# EAGLE board Qwiic_Haptic_Driver_DA7280-Panel_SOLDERING_JIG (EAGLE 9.6.2), part 1 of 4
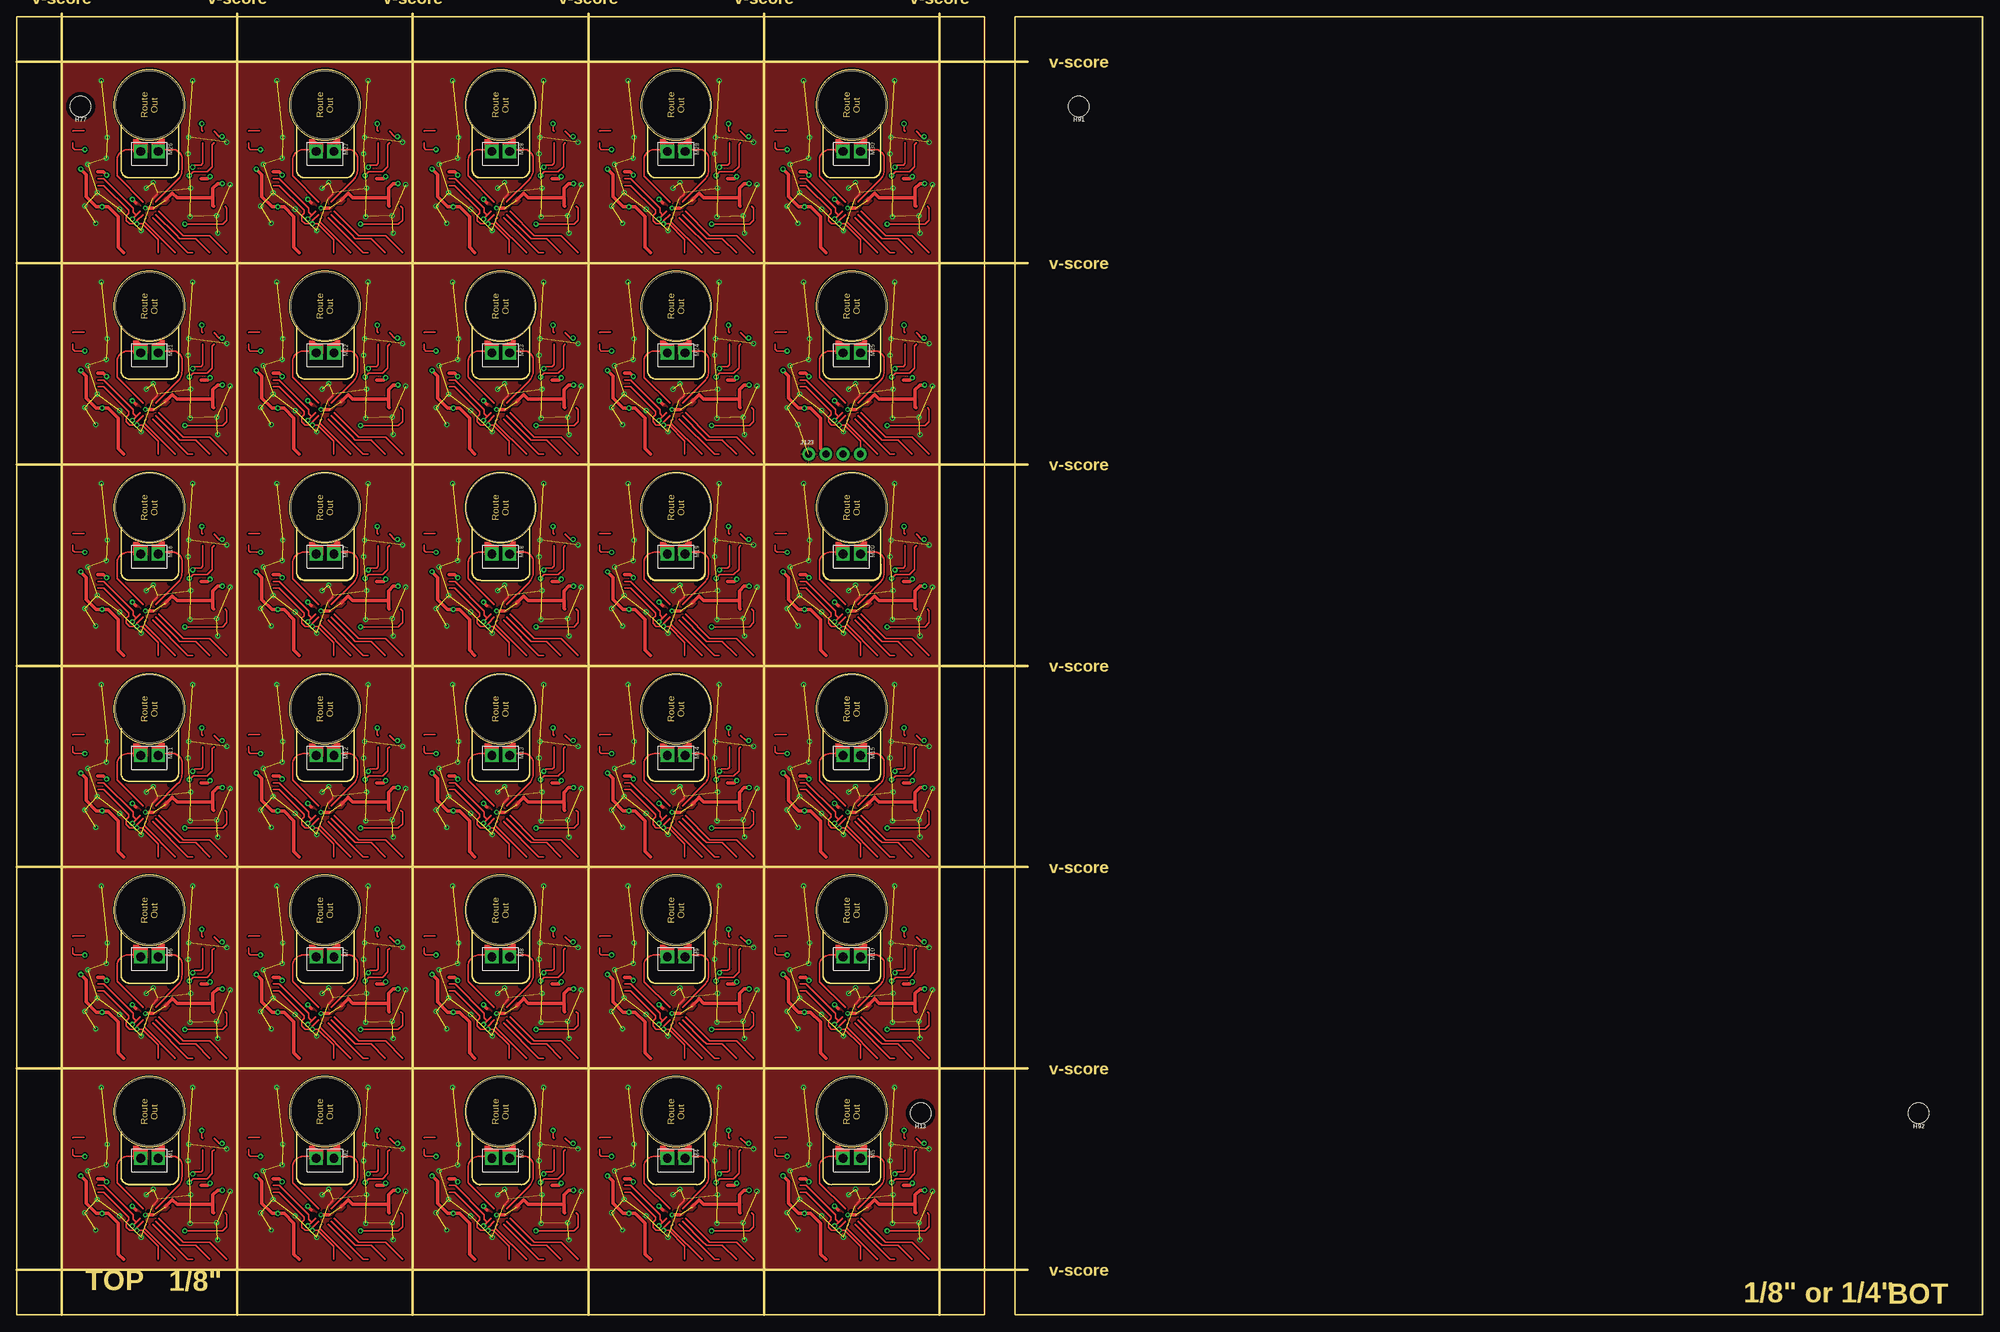
[diagram p0: board, top side]
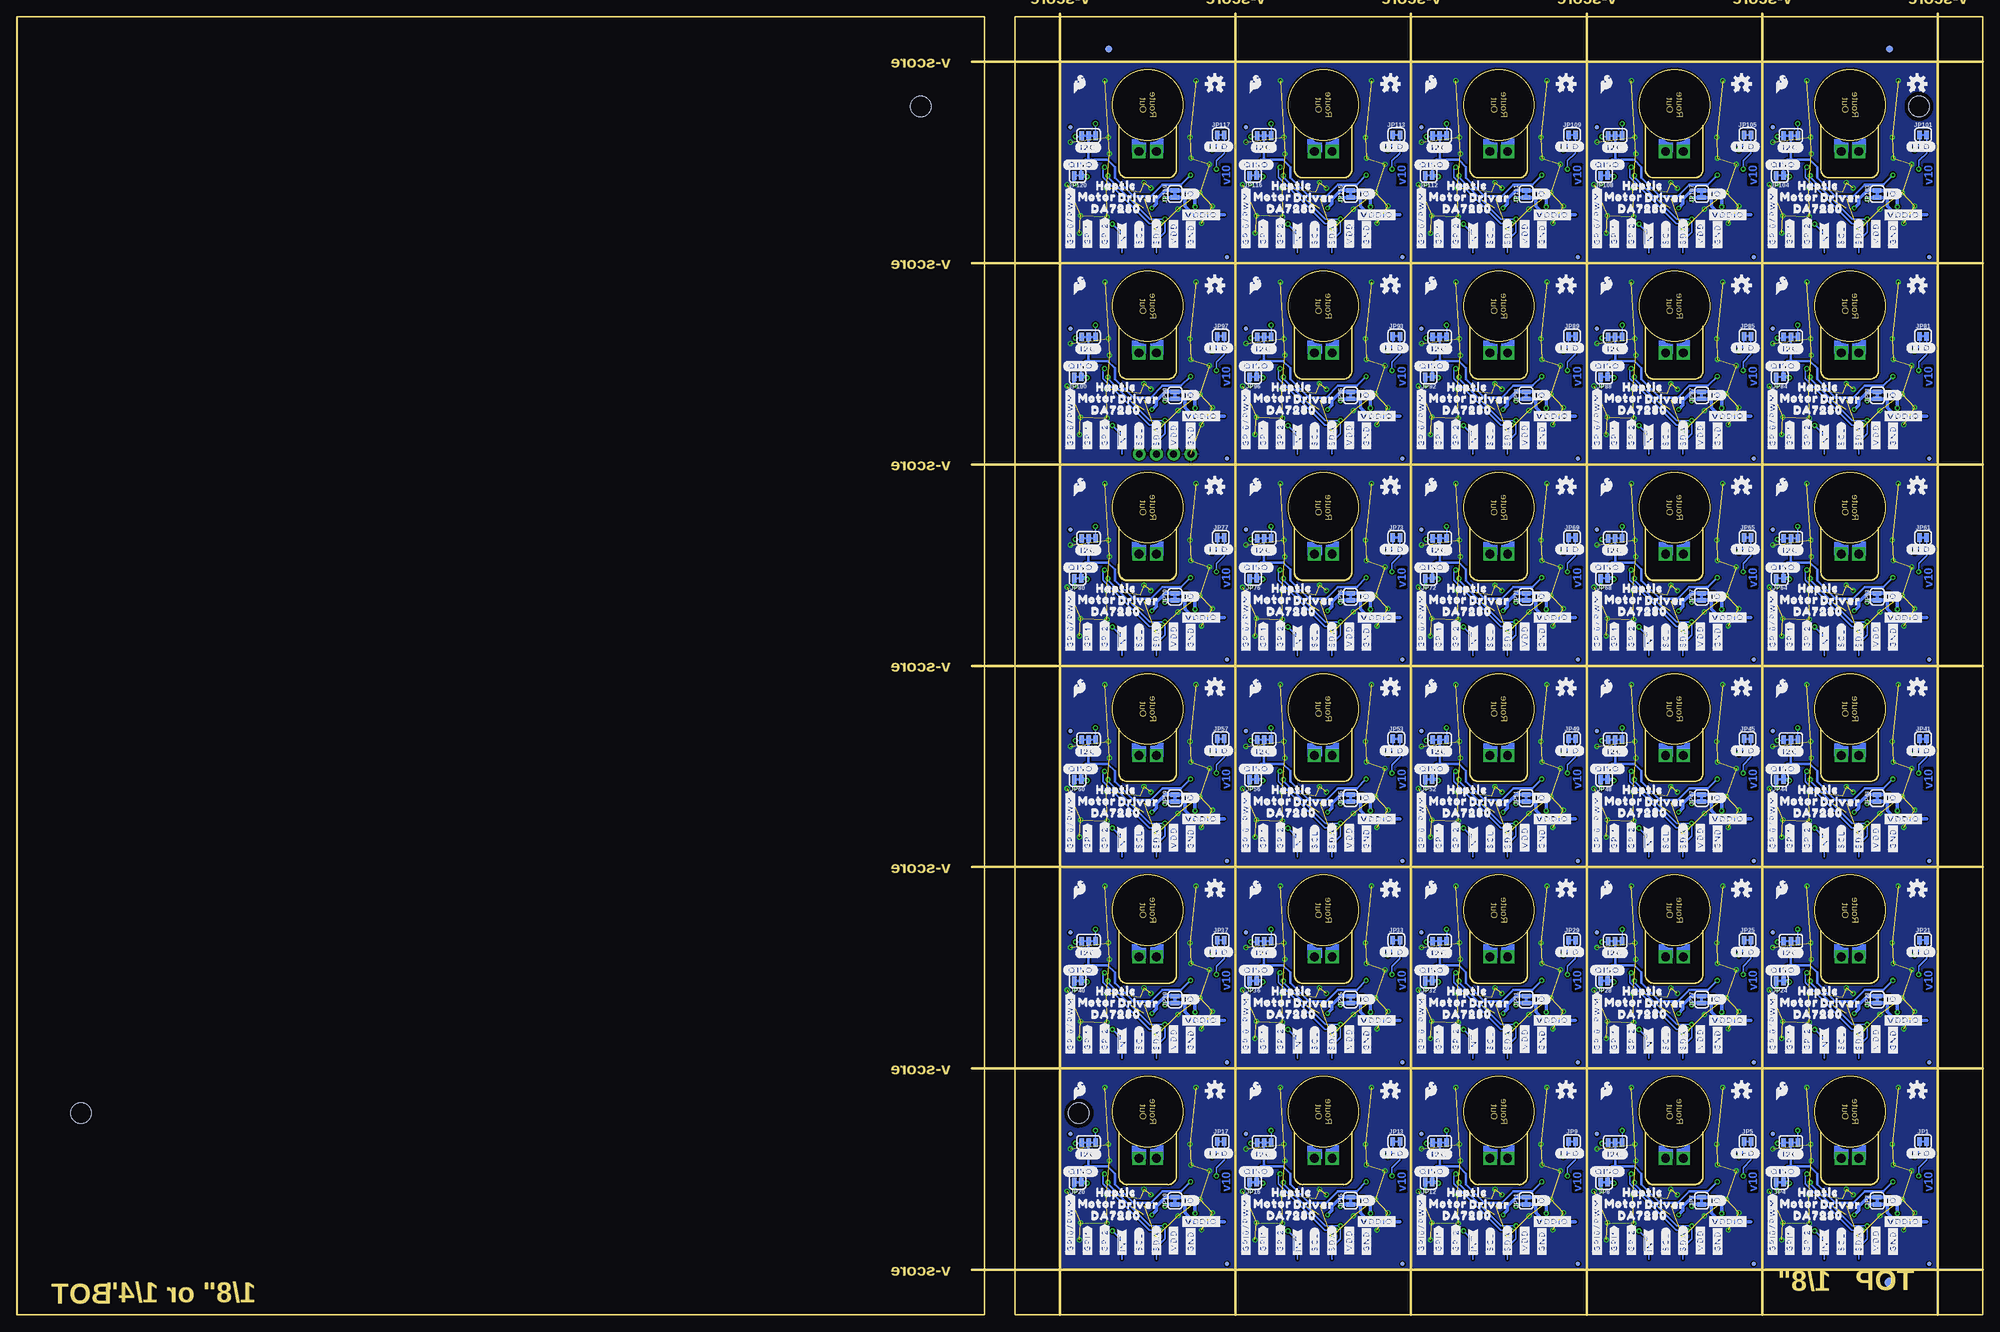
[diagram p1: board, bottom side, seen from below]

Size 290.07 x 191.52 mm. Coordinates in mm from the lower left corner, seen from the top.
Outline: 282 segments
Copper layers (1*16): Top 0.035mm / dielectric 1.5mm / Bottom 0.035mm
Design rules "Qwiic_Haptic_Driver_DA7280": minimum track width 7mil, minimum drill 15mil, track to track 7mil, track to pad 7mil, pad to pad 7mil, via to via 7mil, smd to smd 7mil, copper to edge 7mil, drill to drill 7mil, minimum pad ring 7mil, minimum via ring 7mil, stop-mask expansion 4mil, vias tented up to drill 25mil, thermal gap 10mil
tRestrict: area 19.4,15.2 to 19.7,15.3; area 22.4,18.7 to 22.6,18.8; area 45.3,15.2 to 45.6,15.3; area 48.3,18.7 to 48.5,18.8; area 71.2,15.2 to 71.6,15.3; area 74.2,18.7 to 74.4,18.8; area 97.1,15.2 to 97.5,15.3; area 100.1,18.7 to 100.3,18.8; area 123,15.2 to 123.4,15.3; area 126,18.7 to 126.2,18.8; area 19.4,44.9 to 19.7,45.1; area 22.4,48.4 to 22.6,48.6; 48 more areas
Milling: 13 lines

## Footprints (pad centres in the part's own frame; a part is rotated, then mirrored left to right if it is on the bottom)
FIDUCIAL-1X2 = smd 1 x 1: 1 0,0
FIDUCIAL-1.5X3 = smd 1.5 x 1.5: 1 0,0
FIDUCIAL-MICRO = smd 0.635 x 0.635: 1 0,0
STAND-OFF-TIGHT = hole 3.048: 0,0
1X04_NO_SILK = drill 1.016 pad 1.88: 1 0,0; 2 2.54,0; 3 5.08,0; 4 7.62,0
SMT-JUMPER_2_NC_TRACE_SILK = smd 0.66 x 1.27: 1 -0.521,0; 2 0.521,0
SMT-JUMPER_3_2-NC_TRACE_SILK = smd 0.66 x 1.27: 1 -1.041,0; 2 0,0; 3 1.041,0
COIN_VIBRATION_MOTOR_CASTEL = drill 1.3 square: P$1 6.87,1.31; P$2 6.87,-1.29

## Placement (x,y rotation side)
E$2  [FIDUCIAL-1X2]  13.72,186.75 0 bottom
E$4  [FIDUCIAL-1X2]  128.97,186.75 0 bottom
E$6  [FIDUCIAL-1.5X3]  13.72,4.76 0 bottom
FD2  FIDUCIALUFIDUCIAL  [FIDUCIAL-MICRO]  7.87,7.49 180 bottom
FD4  FIDUCIALUFIDUCIAL  [FIDUCIAL-MICRO]  30.99,26.67 180 bottom
FD6  FIDUCIALUFIDUCIAL  [FIDUCIAL-MICRO]  33.78,7.49 180 bottom
FD8  FIDUCIALUFIDUCIAL  [FIDUCIAL-MICRO]  56.9,26.67 180 bottom
FD10  FIDUCIALUFIDUCIAL  [FIDUCIAL-MICRO]  59.69,7.49 180 bottom
FD12  FIDUCIALUFIDUCIAL  [FIDUCIAL-MICRO]  82.8,26.67 180 bottom
FD14  FIDUCIALUFIDUCIAL  [FIDUCIAL-MICRO]  85.6,7.49 180 bottom
FD16  FIDUCIALUFIDUCIAL  [FIDUCIAL-MICRO]  108.71,26.67 180 bottom
FD18  FIDUCIALUFIDUCIAL  [FIDUCIAL-MICRO]  111.51,7.49 180 bottom
FD20  FIDUCIALUFIDUCIAL  [FIDUCIAL-MICRO]  134.62,26.67 180 bottom
FD22  FIDUCIALUFIDUCIAL  [FIDUCIAL-MICRO]  7.87,37.21 180 bottom
FD24  FIDUCIALUFIDUCIAL  [FIDUCIAL-MICRO]  30.99,56.39 180 bottom
FD26  FIDUCIALUFIDUCIAL  [FIDUCIAL-MICRO]  33.78,37.21 180 bottom
FD28  FIDUCIALUFIDUCIAL  [FIDUCIAL-MICRO]  56.9,56.39 180 bottom
FD30  FIDUCIALUFIDUCIAL  [FIDUCIAL-MICRO]  59.69,37.21 180 bottom
FD32  FIDUCIALUFIDUCIAL  [FIDUCIAL-MICRO]  82.8,56.39 180 bottom
FD34  FIDUCIALUFIDUCIAL  [FIDUCIAL-MICRO]  85.6,37.21 180 bottom
FD36  FIDUCIALUFIDUCIAL  [FIDUCIAL-MICRO]  108.71,56.39 180 bottom
FD38  FIDUCIALUFIDUCIAL  [FIDUCIAL-MICRO]  111.51,37.21 180 bottom
FD40  FIDUCIALUFIDUCIAL  [FIDUCIAL-MICRO]  134.62,56.39 180 bottom
FD42  FIDUCIALUFIDUCIAL  [FIDUCIAL-MICRO]  7.87,66.93 180 bottom
FD44  FIDUCIALUFIDUCIAL  [FIDUCIAL-MICRO]  30.99,86.11 180 bottom
FD46  FIDUCIALUFIDUCIAL  [FIDUCIAL-MICRO]  33.78,66.93 180 bottom
FD48  FIDUCIALUFIDUCIAL  [FIDUCIAL-MICRO]  56.9,86.11 180 bottom
FD50  FIDUCIALUFIDUCIAL  [FIDUCIAL-MICRO]  59.69,66.93 180 bottom
FD52  FIDUCIALUFIDUCIAL  [FIDUCIAL-MICRO]  82.8,86.11 180 bottom
FD54  FIDUCIALUFIDUCIAL  [FIDUCIAL-MICRO]  85.6,66.93 180 bottom
FD56  FIDUCIALUFIDUCIAL  [FIDUCIAL-MICRO]  108.71,86.11 180 bottom
FD58  FIDUCIALUFIDUCIAL  [FIDUCIAL-MICRO]  111.51,66.93 180 bottom
FD60  FIDUCIALUFIDUCIAL  [FIDUCIAL-MICRO]  134.62,86.11 180 bottom
FD62  FIDUCIALUFIDUCIAL  [FIDUCIAL-MICRO]  7.87,96.65 180 bottom
FD64  FIDUCIALUFIDUCIAL  [FIDUCIAL-MICRO]  30.99,115.82 180 bottom
FD66  FIDUCIALUFIDUCIAL  [FIDUCIAL-MICRO]  33.78,96.65 180 bottom
FD68  FIDUCIALUFIDUCIAL  [FIDUCIAL-MICRO]  56.9,115.82 180 bottom
FD70  FIDUCIALUFIDUCIAL  [FIDUCIAL-MICRO]  59.69,96.65 180 bottom
FD72  FIDUCIALUFIDUCIAL  [FIDUCIAL-MICRO]  82.8,115.82 180 bottom
FD74  FIDUCIALUFIDUCIAL  [FIDUCIAL-MICRO]  85.6,96.65 180 bottom
FD76  FIDUCIALUFIDUCIAL  [FIDUCIAL-MICRO]  108.71,115.82 180 bottom
FD78  FIDUCIALUFIDUCIAL  [FIDUCIAL-MICRO]  111.51,96.65 180 bottom
FD80  FIDUCIALUFIDUCIAL  [FIDUCIAL-MICRO]  134.62,115.82 180 bottom
FD82  FIDUCIALUFIDUCIAL  [FIDUCIAL-MICRO]  7.87,126.37 180 bottom
FD84  FIDUCIALUFIDUCIAL  [FIDUCIAL-MICRO]  30.99,145.54 180 bottom
FD86  FIDUCIALUFIDUCIAL  [FIDUCIAL-MICRO]  33.78,126.37 180 bottom
FD88  FIDUCIALUFIDUCIAL  [FIDUCIAL-MICRO]  56.9,145.54 180 bottom
FD90  FIDUCIALUFIDUCIAL  [FIDUCIAL-MICRO]  59.69,126.37 180 bottom
FD92  FIDUCIALUFIDUCIAL  [FIDUCIAL-MICRO]  82.8,145.54 180 bottom
FD94  FIDUCIALUFIDUCIAL  [FIDUCIAL-MICRO]  85.6,126.37 180 bottom
FD96  FIDUCIALUFIDUCIAL  [FIDUCIAL-MICRO]  108.71,145.54 180 bottom
FD98  FIDUCIALUFIDUCIAL  [FIDUCIAL-MICRO]  111.51,126.37 180 bottom
FD100  FIDUCIALUFIDUCIAL  [FIDUCIAL-MICRO]  134.62,145.54 180 bottom
FD102  FIDUCIALUFIDUCIAL  [FIDUCIAL-MICRO]  7.87,156.08 180 bottom
FD104  FIDUCIALUFIDUCIAL  [FIDUCIAL-MICRO]  30.99,175.26 180 bottom
FD106  FIDUCIALUFIDUCIAL  [FIDUCIAL-MICRO]  33.78,156.08 180 bottom
FD108  FIDUCIALUFIDUCIAL  [FIDUCIAL-MICRO]  56.9,175.26 180 bottom
FD110  FIDUCIALUFIDUCIAL  [FIDUCIAL-MICRO]  59.69,156.08 180 bottom
FD112  FIDUCIALUFIDUCIAL  [FIDUCIAL-MICRO]  82.8,175.26 180 bottom
FD114  FIDUCIALUFIDUCIAL  [FIDUCIAL-MICRO]  85.6,156.08 180 bottom
FD116  FIDUCIALUFIDUCIAL  [FIDUCIAL-MICRO]  108.71,175.26 180 bottom
FD118  FIDUCIALUFIDUCIAL  [FIDUCIAL-MICRO]  111.51,156.08 180 bottom
FD120  FIDUCIALUFIDUCIAL  [FIDUCIAL-MICRO]  134.62,175.26 180 bottom
H13  STAND-OFFTIGHT  [STAND-OFF-TIGHT]  133.35,29.72 180 top
H77  STAND-OFFTIGHT  [STAND-OFF-TIGHT]  9.4,178.31 180 top
H91  STAND-OFFTIGHT  [STAND-OFF-TIGHT]  156.7,178.31 180 top
H92  STAND-OFFTIGHT  [STAND-OFF-TIGHT]  280.65,29.72 180 top
J123  [1X04_NO_SILK]  116.84,127 0 top
JP1  LED  [SMT-JUMPER_2_NC_TRACE_SILK]  8.78,25.53 0 bottom
JP2  LED  [SMT-JUMPER_2_NC_TRACE_SILK]  15.54,16.79 90 bottom
JP3  I2C_PU  [SMT-JUMPER_3_2-NC_TRACE_SILK]  28.3,25.4 180 bottom
JP4  LED  [SMT-JUMPER_2_NC_TRACE_SILK]  29.92,19.53 180 bottom
JP5  LED  [SMT-JUMPER_2_NC_TRACE_SILK]  34.68,25.53 0 bottom
JP6  I2C_PU  [SMT-JUMPER_3_2-NC_TRACE_SILK]  54.2,25.4 180 bottom
JP7  LED  [SMT-JUMPER_2_NC_TRACE_SILK]  41.45,16.79 90 bottom
JP8  LED  [SMT-JUMPER_2_NC_TRACE_SILK]  55.83,19.53 180 bottom
JP9  LED  [SMT-JUMPER_2_NC_TRACE_SILK]  60.59,25.53 0 bottom
JP10  I2C_PU  [SMT-JUMPER_3_2-NC_TRACE_SILK]  80.11,25.4 180 bottom
JP11  LED  [SMT-JUMPER_2_NC_TRACE_SILK]  67.36,16.79 90 bottom
JP12  LED  [SMT-JUMPER_2_NC_TRACE_SILK]  81.74,19.53 180 bottom
JP13  LED  [SMT-JUMPER_2_NC_TRACE_SILK]  86.5,25.53 0 bottom
JP14  I2C_PU  [SMT-JUMPER_3_2-NC_TRACE_SILK]  106.02,25.4 180 bottom
JP15  LED  [SMT-JUMPER_2_NC_TRACE_SILK]  93.27,16.79 90 bottom
JP16  LED  [SMT-JUMPER_2_NC_TRACE_SILK]  107.65,19.53 180 bottom
JP17  LED  [SMT-JUMPER_2_NC_TRACE_SILK]  112.41,25.53 0 bottom
JP18  I2C_PU  [SMT-JUMPER_3_2-NC_TRACE_SILK]  131.93,25.4 180 bottom
JP19  LED  [SMT-JUMPER_2_NC_TRACE_SILK]  119.18,16.79 90 bottom
JP20  LED  [SMT-JUMPER_2_NC_TRACE_SILK]  133.55,19.53 180 bottom
JP21  LED  [SMT-JUMPER_2_NC_TRACE_SILK]  8.78,55.24 0 bottom
JP22  I2C_PU  [SMT-JUMPER_3_2-NC_TRACE_SILK]  28.3,55.12 180 bottom
JP23  LED  [SMT-JUMPER_2_NC_TRACE_SILK]  15.54,46.51 90 bottom
JP24  LED  [SMT-JUMPER_2_NC_TRACE_SILK]  29.92,49.25 180 bottom
JP25  LED  [SMT-JUMPER_2_NC_TRACE_SILK]  34.68,55.24 0 bottom
JP26  I2C_PU  [SMT-JUMPER_3_2-NC_TRACE_SILK]  54.2,55.12 180 bottom
JP27  LED  [SMT-JUMPER_2_NC_TRACE_SILK]  41.45,46.51 90 bottom
JP28  LED  [SMT-JUMPER_2_NC_TRACE_SILK]  55.83,49.25 180 bottom
JP29  LED  [SMT-JUMPER_2_NC_TRACE_SILK]  60.59,55.24 0 bottom
JP30  I2C_PU  [SMT-JUMPER_3_2-NC_TRACE_SILK]  80.11,55.12 180 bottom
JP31  LED  [SMT-JUMPER_2_NC_TRACE_SILK]  67.36,46.51 90 bottom
JP32  LED  [SMT-JUMPER_2_NC_TRACE_SILK]  81.74,49.25 180 bottom
JP33  LED  [SMT-JUMPER_2_NC_TRACE_SILK]  86.5,55.24 0 bottom
JP34  I2C_PU  [SMT-JUMPER_3_2-NC_TRACE_SILK]  106.02,55.12 180 bottom
JP35  LED  [SMT-JUMPER_2_NC_TRACE_SILK]  93.27,46.51 90 bottom
JP36  LED  [SMT-JUMPER_2_NC_TRACE_SILK]  107.65,49.25 180 bottom
JP37  LED  [SMT-JUMPER_2_NC_TRACE_SILK]  112.41,55.24 0 bottom
JP38  I2C_PU  [SMT-JUMPER_3_2-NC_TRACE_SILK]  131.93,55.12 180 bottom
JP39  LED  [SMT-JUMPER_2_NC_TRACE_SILK]  119.18,46.51 90 bottom
JP40  LED  [SMT-JUMPER_2_NC_TRACE_SILK]  133.55,49.25 180 bottom
JP41  LED  [SMT-JUMPER_2_NC_TRACE_SILK]  8.78,84.96 0 bottom
JP42  I2C_PU  [SMT-JUMPER_3_2-NC_TRACE_SILK]  28.3,84.84 180 bottom
JP43  LED  [SMT-JUMPER_2_NC_TRACE_SILK]  15.54,76.23 90 bottom
JP44  LED  [SMT-JUMPER_2_NC_TRACE_SILK]  29.92,78.97 180 bottom
JP45  LED  [SMT-JUMPER_2_NC_TRACE_SILK]  34.68,84.96 0 bottom
JP46  I2C_PU  [SMT-JUMPER_3_2-NC_TRACE_SILK]  54.2,84.84 180 bottom
JP47  LED  [SMT-JUMPER_2_NC_TRACE_SILK]  41.45,76.23 90 bottom
JP48  LED  [SMT-JUMPER_2_NC_TRACE_SILK]  55.83,78.97 180 bottom
JP49  LED  [SMT-JUMPER_2_NC_TRACE_SILK]  60.59,84.96 0 bottom
JP50  I2C_PU  [SMT-JUMPER_3_2-NC_TRACE_SILK]  80.11,84.84 180 bottom
JP51  LED  [SMT-JUMPER_2_NC_TRACE_SILK]  67.36,76.23 90 bottom
JP52  LED  [SMT-JUMPER_2_NC_TRACE_SILK]  81.74,78.97 180 bottom
JP53  LED  [SMT-JUMPER_2_NC_TRACE_SILK]  86.5,84.96 0 bottom
JP54  I2C_PU  [SMT-JUMPER_3_2-NC_TRACE_SILK]  106.02,84.84 180 bottom
JP55  LED  [SMT-JUMPER_2_NC_TRACE_SILK]  93.27,76.23 90 bottom
JP56  LED  [SMT-JUMPER_2_NC_TRACE_SILK]  107.65,78.97 180 bottom
JP57  LED  [SMT-JUMPER_2_NC_TRACE_SILK]  112.41,84.96 0 bottom
JP58  I2C_PU  [SMT-JUMPER_3_2-NC_TRACE_SILK]  131.93,84.84 180 bottom
JP59  LED  [SMT-JUMPER_2_NC_TRACE_SILK]  119.18,76.23 90 bottom
JP60  LED  [SMT-JUMPER_2_NC_TRACE_SILK]  133.55,78.97 180 bottom
JP61  LED  [SMT-JUMPER_2_NC_TRACE_SILK]  8.78,114.68 0 bottom
JP62  I2C_PU  [SMT-JUMPER_3_2-NC_TRACE_SILK]  28.3,114.55 180 bottom
JP63  LED  [SMT-JUMPER_2_NC_TRACE_SILK]  15.54,105.95 90 bottom
JP64  LED  [SMT-JUMPER_2_NC_TRACE_SILK]  29.92,108.69 180 bottom
JP65  LED  [SMT-JUMPER_2_NC_TRACE_SILK]  34.68,114.68 0 bottom
JP66  I2C_PU  [SMT-JUMPER_3_2-NC_TRACE_SILK]  54.2,114.55 180 bottom
JP67  LED  [SMT-JUMPER_2_NC_TRACE_SILK]  41.45,105.95 90 bottom
JP68  LED  [SMT-JUMPER_2_NC_TRACE_SILK]  55.83,108.69 180 bottom
JP69  LED  [SMT-JUMPER_2_NC_TRACE_SILK]  60.59,114.68 0 bottom
JP70  I2C_PU  [SMT-JUMPER_3_2-NC_TRACE_SILK]  80.11,114.55 180 bottom
JP71  LED  [SMT-JUMPER_2_NC_TRACE_SILK]  67.36,105.95 90 bottom
JP72  LED  [SMT-JUMPER_2_NC_TRACE_SILK]  81.74,108.69 180 bottom
JP73  LED  [SMT-JUMPER_2_NC_TRACE_SILK]  86.5,114.68 0 bottom
JP74  I2C_PU  [SMT-JUMPER_3_2-NC_TRACE_SILK]  106.02,114.55 180 bottom
JP75  LED  [SMT-JUMPER_2_NC_TRACE_SILK]  93.27,105.95 90 bottom
JP76  LED  [SMT-JUMPER_2_NC_TRACE_SILK]  107.65,108.69 180 bottom
JP77  LED  [SMT-JUMPER_2_NC_TRACE_SILK]  112.41,114.68 0 bottom
JP78  I2C_PU  [SMT-JUMPER_3_2-NC_TRACE_SILK]  131.93,114.55 180 bottom
JP79  LED  [SMT-JUMPER_2_NC_TRACE_SILK]  119.18,105.95 90 bottom
JP80  LED  [SMT-JUMPER_2_NC_TRACE_SILK]  133.55,108.69 180 bottom
JP81  LED  [SMT-JUMPER_2_NC_TRACE_SILK]  8.78,144.4 0 bottom
JP82  I2C_PU  [SMT-JUMPER_3_2-NC_TRACE_SILK]  28.3,144.27 180 bottom
JP83  LED  [SMT-JUMPER_2_NC_TRACE_SILK]  15.54,135.67 90 bottom
JP84  LED  [SMT-JUMPER_2_NC_TRACE_SILK]  29.92,138.4 180 bottom
JP85  LED  [SMT-JUMPER_2_NC_TRACE_SILK]  34.68,144.4 0 bottom
JP86  I2C_PU  [SMT-JUMPER_3_2-NC_TRACE_SILK]  54.2,144.27 180 bottom
JP87  LED  [SMT-JUMPER_2_NC_TRACE_SILK]  41.45,135.67 90 bottom
JP88  LED  [SMT-JUMPER_2_NC_TRACE_SILK]  55.83,138.4 180 bottom
JP89  LED  [SMT-JUMPER_2_NC_TRACE_SILK]  60.59,144.4 0 bottom
JP90  I2C_PU  [SMT-JUMPER_3_2-NC_TRACE_SILK]  80.11,144.27 180 bottom
JP91  LED  [SMT-JUMPER_2_NC_TRACE_SILK]  67.36,135.67 90 bottom
JP92  LED  [SMT-JUMPER_2_NC_TRACE_SILK]  81.74,138.4 180 bottom
JP93  LED  [SMT-JUMPER_2_NC_TRACE_SILK]  86.5,144.4 0 bottom
JP94  I2C_PU  [SMT-JUMPER_3_2-NC_TRACE_SILK]  106.02,144.27 180 bottom
JP95  LED  [SMT-JUMPER_2_NC_TRACE_SILK]  93.27,135.67 90 bottom
JP96  LED  [SMT-JUMPER_2_NC_TRACE_SILK]  107.65,138.4 180 bottom
JP97  LED  [SMT-JUMPER_2_NC_TRACE_SILK]  112.41,144.4 0 bottom
JP98  I2C_PU  [SMT-JUMPER_3_2-NC_TRACE_SILK]  131.93,144.27 180 bottom
JP99  LED  [SMT-JUMPER_2_NC_TRACE_SILK]  119.18,135.67 90 bottom
JP100  LED  [SMT-JUMPER_2_NC_TRACE_SILK]  133.55,138.4 180 bottom
JP101  LED  [SMT-JUMPER_2_NC_TRACE_SILK]  8.78,174.12 0 bottom
JP102  I2C_PU  [SMT-JUMPER_3_2-NC_TRACE_SILK]  28.3,173.99 180 bottom
JP103  LED  [SMT-JUMPER_2_NC_TRACE_SILK]  15.54,165.38 90 bottom
JP104  LED  [SMT-JUMPER_2_NC_TRACE_SILK]  29.92,168.12 180 bottom
JP105  LED  [SMT-JUMPER_2_NC_TRACE_SILK]  34.68,174.12 0 bottom
JP106  I2C_PU  [SMT-JUMPER_3_2-NC_TRACE_SILK]  54.2,173.99 180 bottom
JP107  LED  [SMT-JUMPER_2_NC_TRACE_SILK]  41.45,165.38 90 bottom
JP108  LED  [SMT-JUMPER_2_NC_TRACE_SILK]  55.83,168.12 180 bottom
JP109  LED  [SMT-JUMPER_2_NC_TRACE_SILK]  60.59,174.12 0 bottom
JP110  I2C_PU  [SMT-JUMPER_3_2-NC_TRACE_SILK]  80.11,173.99 180 bottom
JP111  LED  [SMT-JUMPER_2_NC_TRACE_SILK]  67.36,165.38 90 bottom
JP112  LED  [SMT-JUMPER_2_NC_TRACE_SILK]  81.74,168.12 180 bottom
JP113  LED  [SMT-JUMPER_2_NC_TRACE_SILK]  86.5,174.12 0 bottom
JP114  I2C_PU  [SMT-JUMPER_3_2-NC_TRACE_SILK]  106.02,173.99 180 bottom
JP115  LED  [SMT-JUMPER_2_NC_TRACE_SILK]  93.27,165.38 90 bottom
JP116  LED  [SMT-JUMPER_2_NC_TRACE_SILK]  107.65,168.12 180 bottom
JP117  LED  [SMT-JUMPER_2_NC_TRACE_SILK]  112.41,174.12 0 bottom
JP118  I2C_PU  [SMT-JUMPER_3_2-NC_TRACE_SILK]  131.93,173.99 180 bottom
JP119  LED  [SMT-JUMPER_2_NC_TRACE_SILK]  119.18,165.38 90 bottom
JP120  LED  [SMT-JUMPER_2_NC_TRACE_SILK]  133.55,168.12 180 bottom
LOGO1  OSHW-LOGOS  [OSHW-LOGO-S]  35.56,33.02 0 bottom
LOGO2  OSHW-LOGOS  [OSHW-LOGO-S]  9.65,33.02 0 bottom
LOGO5  OSHW-LOGOS  [OSHW-LOGO-S]  61.47,33.02 0 bottom
LOGO7  OSHW-LOGOS  [OSHW-LOGO-S]  87.38,33.02 0 bottom
LOGO9  OSHW-LOGOS  [OSHW-LOGO-S]  113.28,33.02 0 bottom
LOGO11  OSHW-LOGOS  [OSHW-LOGO-S]  9.65,62.74 0 bottom
LOGO13  OSHW-LOGOS  [OSHW-LOGO-S]  35.56,62.74 0 bottom
LOGO15  OSHW-LOGOS  [OSHW-LOGO-S]  61.47,62.74 0 bottom
LOGO17  OSHW-LOGOS  [OSHW-LOGO-S]  87.38,62.74 0 bottom
LOGO19  OSHW-LOGOS  [OSHW-LOGO-S]  113.28,62.74 0 bottom
LOGO21  OSHW-LOGOS  [OSHW-LOGO-S]  9.65,92.46 0 bottom
LOGO23  OSHW-LOGOS  [OSHW-LOGO-S]  35.56,92.46 0 bottom
LOGO25  OSHW-LOGOS  [OSHW-LOGO-S]  61.47,92.46 0 bottom
LOGO27  OSHW-LOGOS  [OSHW-LOGO-S]  87.38,92.46 0 bottom
LOGO29  OSHW-LOGOS  [OSHW-LOGO-S]  113.28,92.46 0 bottom
LOGO31  OSHW-LOGOS  [OSHW-LOGO-S]  9.65,122.17 0 bottom
LOGO33  OSHW-LOGOS  [OSHW-LOGO-S]  35.56,122.17 0 bottom
LOGO35  OSHW-LOGOS  [OSHW-LOGO-S]  61.47,122.17 0 bottom
LOGO37  OSHW-LOGOS  [OSHW-LOGO-S]  87.38,122.17 0 bottom
LOGO39  OSHW-LOGOS  [OSHW-LOGO-S]  113.28,122.17 0 bottom
LOGO41  OSHW-LOGOS  [OSHW-LOGO-S]  9.65,151.89 0 bottom
LOGO43  OSHW-LOGOS  [OSHW-LOGO-S]  35.56,151.89 0 bottom
LOGO45  OSHW-LOGOS  [OSHW-LOGO-S]  61.47,151.89 0 bottom
LOGO47  OSHW-LOGOS  [OSHW-LOGO-S]  87.38,151.89 0 bottom
LOGO49  OSHW-LOGOS  [OSHW-LOGO-S]  113.28,151.89 0 bottom
LOGO51  OSHW-LOGOS  [OSHW-LOGO-S]  9.65,181.61 0 bottom
LOGO53  OSHW-LOGOS  [OSHW-LOGO-S]  35.56,181.61 0 bottom
LOGO55  OSHW-LOGOS  [OSHW-LOGO-S]  61.47,181.61 0 bottom
LOGO57  OSHW-LOGOS  [OSHW-LOGO-S]  87.38,181.61 0 bottom
LOGO59  OSHW-LOGOS  [OSHW-LOGO-S]  113.28,181.61 0 bottom
M1  G1040003D_LRA_CASTELLATED  [COIN_VIBRATION_MOTOR_CASTEL]  19.56,29.95 270 top
M2  G1040003D_LRA_CASTELLATED  [COIN_VIBRATION_MOTOR_CASTEL]  45.47,29.95 270 top
M3  G1040003D_LRA_CASTELLATED  [COIN_VIBRATION_MOTOR_CASTEL]  71.37,29.95 270 top
M4  G1040003D_LRA_CASTELLATED  [COIN_VIBRATION_MOTOR_CASTEL]  97.28,29.95 270 top
M5  G1040003D_LRA_CASTELLATED  [COIN_VIBRATION_MOTOR_CASTEL]  123.19,29.95 270 top
M6  G1040003D_LRA_CASTELLATED  [COIN_VIBRATION_MOTOR_CASTEL]  19.56,59.67 270 top
M7  G1040003D_LRA_CASTELLATED  [COIN_VIBRATION_MOTOR_CASTEL]  45.47,59.67 270 top
M8  G1040003D_LRA_CASTELLATED  [COIN_VIBRATION_MOTOR_CASTEL]  71.37,59.67 270 top
M9  G1040003D_LRA_CASTELLATED  [COIN_VIBRATION_MOTOR_CASTEL]  97.28,59.67 270 top
M10  G1040003D_LRA_CASTELLATED  [COIN_VIBRATION_MOTOR_CASTEL]  123.19,59.67 270 top
M11  G1040003D_LRA_CASTELLATED  [COIN_VIBRATION_MOTOR_CASTEL]  19.56,89.38 270 top
M12  G1040003D_LRA_CASTELLATED  [COIN_VIBRATION_MOTOR_CASTEL]  45.47,89.38 270 top
M13  G1040003D_LRA_CASTELLATED  [COIN_VIBRATION_MOTOR_CASTEL]  71.37,89.38 270 top
M14  G1040003D_LRA_CASTELLATED  [COIN_VIBRATION_MOTOR_CASTEL]  97.28,89.38 270 top
M15  G1040003D_LRA_CASTELLATED  [COIN_VIBRATION_MOTOR_CASTEL]  123.19,89.38 270 top
M16  G1040003D_LRA_CASTELLATED  [COIN_VIBRATION_MOTOR_CASTEL]  19.56,119.1 270 top
M17  G1040003D_LRA_CASTELLATED  [COIN_VIBRATION_MOTOR_CASTEL]  45.47,119.1 270 top
M18  G1040003D_LRA_CASTELLATED  [COIN_VIBRATION_MOTOR_CASTEL]  71.37,119.1 270 top
M19  G1040003D_LRA_CASTELLATED  [COIN_VIBRATION_MOTOR_CASTEL]  97.28,119.1 270 top
M20  G1040003D_LRA_CASTELLATED  [COIN_VIBRATION_MOTOR_CASTEL]  123.19,119.1 270 top
M21  G1040003D_LRA_CASTELLATED  [COIN_VIBRATION_MOTOR_CASTEL]  19.56,148.82 270 top
M22  G1040003D_LRA_CASTELLATED  [COIN_VIBRATION_MOTOR_CASTEL]  45.47,148.82 270 top
M23  G1040003D_LRA_CASTELLATED  [COIN_VIBRATION_MOTOR_CASTEL]  71.37,148.82 270 top
M24  G1040003D_LRA_CASTELLATED  [COIN_VIBRATION_MOTOR_CASTEL]  97.28,148.82 270 top
M25  G1040003D_LRA_CASTELLATED  [COIN_VIBRATION_MOTOR_CASTEL]  123.19,148.82 270 top
M26  G1040003D_LRA_CASTELLATED  [COIN_VIBRATION_MOTOR_CASTEL]  19.56,178.54 270 top
M27  G1040003D_LRA_CASTELLATED  [COIN_VIBRATION_MOTOR_CASTEL]  45.47,178.54 270 top
M28  G1040003D_LRA_CASTELLATED  [COIN_VIBRATION_MOTOR_CASTEL]  71.37,178.54 270 top
M29  G1040003D_LRA_CASTELLATED  [COIN_VIBRATION_MOTOR_CASTEL]  97.28,178.54 270 top
M30  G1040003D_LRA_CASTELLATED  [COIN_VIBRATION_MOTOR_CASTEL]  123.19,178.54 270 top
U$7  [#VDD#4]  15.75,10.92 90 bottom
U$9  [HAPTIC6]  24.26,18.03 0 bottom
U$10  [MOTOR7]  27.05,16.38 0 bottom
U$11  [DRIVER8]  20.95,16.26 0 bottom
U$12  [#GPI0#PWM#2]  30.99,13.16 90 bottom
U$13  [#GPI1#2]  28.45,10.79 90 bottom
U$14  [#GPI2#2]  25.91,10.92 90 bottom
U$16  [#SDA#0]  18.29,10.79 90 bottom
U$18  [#GND#0]  13.21,10.79 90 bottom
U$21  [#SCL#1]  20.83,10.67 90 bottom
U$23  [#I2C#4]  28.34,23.66 0 bottom
U$24  [#LED#4]  9.1,23.79 0 bottom
U$25  [#VDDIO#5]  11.68,13.72 0 bottom
U$26  [SFE_LOGO_FLAME_.1]  29.59,33.02 0 bottom
U$27  [##INT##3]  23.37,10.54 90 bottom
U$29  [DA72809]  24.26,14.61 0 bottom
U$30  [#IO#6]  13.41,16.81 0 bottom
U$31  [#QISO#0]  29.46,21.11 0 bottom
U$36  [#GPI0#PWM#2]  56.9,13.16 90 bottom
U$37  [#GPI1#2]  54.36,10.79 90 bottom
U$38  [#GPI2#2]  51.82,10.92 90 bottom
U$39  [#SDA#0]  44.2,10.79 90 bottom
U$40  [#GND#0]  39.12,10.79 90 bottom
U$43  [#SCL#1]  46.74,10.67 90 bottom
U$44  [#I2C#4]  54.25,23.66 0 bottom
U$45  [#LED#4]  35.01,23.79 0 bottom
U$47  [SFE_LOGO_FLAME_.1]  55.5,33.02 0 bottom
U$48  [##INT##3]  49.28,10.54 90 bottom
U$50  [#VDD#4]  41.66,10.92 90 bottom
U$52  [#VDDIO#5]  37.59,13.72 0 bottom
U$53  [HAPTIC6]  50.16,18.03 0 bottom
U$54  [MOTOR7]  52.96,16.38 0 bottom
U$55  [DRIVER8]  46.86,16.26 0 bottom
U$56  [DA72809]  50.16,14.61 0 bottom
U$57  [#IO#6]  39.32,16.81 0 bottom
U$58  [#QISO#0]  55.37,21.11 0 bottom
U$65  [#GPI0#PWM#2]  82.8,13.16 90 bottom
U$66  [#GPI1#2]  80.26,10.79 90 bottom
U$67  [#GPI2#2]  77.72,10.92 90 bottom
U$68  [#SDA#0]  70.1,10.79 90 bottom
U$69  [#GND#0]  65.02,10.79 90 bottom
U$72  [#SCL#1]  72.64,10.67 90 bottom
U$73  [#I2C#4]  80.16,23.66 0 bottom
U$74  [#LED#4]  60.92,23.79 0 bottom
U$76  [SFE_LOGO_FLAME_.1]  81.41,33.02 0 bottom
U$77  [##INT##3]  75.18,10.54 90 bottom
U$79  [#VDD#4]  67.56,10.92 90 bottom
U$81  [#VDDIO#5]  63.5,13.72 0 bottom
U$82  [HAPTIC6]  76.07,18.03 0 bottom
U$83  [MOTOR7]  78.87,16.38 0 bottom
U$84  [DRIVER8]  72.77,16.26 0 bottom
U$85  [DA72809]  76.07,14.61 0 bottom
U$86  [#IO#6]  65.23,16.81 0 bottom
U$87  [#QISO#0]  81.28,21.11 0 bottom
U$94  [#GPI0#PWM#2]  108.71,13.16 90 bottom
U$95  [#GPI1#2]  106.17,10.79 90 bottom
U$96  [#GPI2#2]  103.63,10.92 90 bottom
U$97  [#SDA#0]  96.01,10.79 90 bottom
U$98  [#GND#0]  90.93,10.79 90 bottom
U$101  [#SCL#1]  98.55,10.67 90 bottom
U$102  [#I2C#4]  106.07,23.66 0 bottom
U$103  [#LED#4]  86.83,23.79 0 bottom
U$105  [SFE_LOGO_FLAME_.1]  107.31,33.02 0 bottom
U$106  [##INT##3]  101.09,10.54 90 bottom
U$108  [#VDD#4]  93.47,10.92 90 bottom
U$110  [#VDDIO#5]  89.41,13.72 0 bottom
U$111  [HAPTIC6]  101.98,18.03 0 bottom
U$112  [MOTOR7]  104.78,16.38 0 bottom
U$113  [DRIVER8]  98.68,16.26 0 bottom
U$114  [DA72809]  101.98,14.61 0 bottom
U$115  [#IO#6]  91.14,16.81 0 bottom
U$116  [#QISO#0]  107.19,21.11 0 bottom
U$123  [#GPI0#PWM#2]  134.62,13.16 90 bottom
U$124  [#GPI1#2]  132.08,10.79 90 bottom
U$125  [#GPI2#2]  129.54,10.92 90 bottom
U$126  [#SDA#0]  121.92,10.79 90 bottom
U$127  [#GND#0]  116.84,10.79 90 bottom
U$130  [#SCL#1]  124.46,10.67 90 bottom
U$131  [#I2C#4]  131.98,23.66 0 bottom
U$132  [#LED#4]  112.73,23.79 0 bottom
U$134  [SFE_LOGO_FLAME_.1]  133.22,33.02 0 bottom
U$135  [##INT##3]  127,10.54 90 bottom
U$137  [#VDD#4]  119.38,10.92 90 bottom
U$139  [#VDDIO#5]  115.32,13.72 0 bottom
U$140  [HAPTIC6]  127.89,18.03 0 bottom
U$141  [MOTOR7]  130.68,16.38 0 bottom
U$142  [DRIVER8]  124.59,16.26 0 bottom
U$143  [DA72809]  127.89,14.61 0 bottom
U$144  [#IO#6]  117.04,16.81 0 bottom
U$145  [#QISO#0]  133.1,21.11 0 bottom
U$152  [#GPI0#PWM#2]  30.99,42.88 90 bottom
U$153  [#GPI1#2]  28.45,40.51 90 bottom
U$154  [#GPI2#2]  25.91,40.64 90 bottom
U$155  [#SDA#0]  18.29,40.51 90 bottom
U$156  [#GND#0]  13.21,40.51 90 bottom
U$159  [#SCL#1]  20.83,40.39 90 bottom
U$160  [#I2C#4]  28.34,53.37 0 bottom
U$161  [#LED#4]  9.1,53.51 0 bottom
U$163  [SFE_LOGO_FLAME_.1]  29.59,62.74 0 bottom
U$164  [##INT##3]  23.37,40.26 90 bottom
U$166  [#VDD#4]  15.75,40.64 90 bottom
U$168  [#VDDIO#5]  11.68,43.43 0 bottom
U$169  [HAPTIC6]  24.26,47.75 0 bottom
U$170  [MOTOR7]  27.05,46.1 0 bottom
U$171  [DRIVER8]  20.95,45.97 0 bottom
U$172  [DA72809]  24.26,44.32 0 bottom
U$173  [#IO#6]  13.41,46.53 0 bottom
U$174  [#QISO#0]  29.46,50.83 0 bottom
U$181  [#GPI0#PWM#2]  56.9,42.88 90 bottom
U$182  [#GPI1#2]  54.36,40.51 90 bottom
U$183  [#GPI2#2]  51.82,40.64 90 bottom
U$184  [#SDA#0]  44.2,40.51 90 bottom
U$185  [#GND#0]  39.12,40.51 90 bottom
U$188  [#SCL#1]  46.74,40.39 90 bottom
U$189  [#I2C#4]  54.25,53.37 0 bottom
U$190  [#LED#4]  35.01,53.51 0 bottom
U$192  [SFE_LOGO_FLAME_.1]  55.5,62.74 0 bottom
U$193  [##INT##3]  49.28,40.26 90 bottom
U$195  [#VDD#4]  41.66,40.64 90 bottom
U$197  [#VDDIO#5]  37.59,43.43 0 bottom
U$198  [HAPTIC6]  50.16,47.75 0 bottom
U$199  [MOTOR7]  52.96,46.1 0 bottom
U$200  [DRIVER8]  46.86,45.97 0 bottom
U$201  [DA72809]  50.16,44.32 0 bottom
U$202  [#IO#6]  39.32,46.53 0 bottom
U$203  [#QISO#0]  55.37,50.83 0 bottom
U$210  [#GPI0#PWM#2]  82.8,42.88 90 bottom
U$211  [#GPI1#2]  80.26,40.51 90 bottom
U$212  [#GPI2#2]  77.72,40.64 90 bottom
U$213  [#SDA#0]  70.1,40.51 90 bottom
U$214  [#GND#0]  65.02,40.51 90 bottom
U$217  [#SCL#1]  72.64,40.39 90 bottom
U$218  [#I2C#4]  80.16,53.37 0 bottom
U$219  [#LED#4]  60.92,53.51 0 bottom
U$221  [SFE_LOGO_FLAME_.1]  81.41,62.74 0 bottom
U$222  [##INT##3]  75.18,40.26 90 bottom
U$224  [#VDD#4]  67.56,40.64 90 bottom
U$226  [#VDDIO#5]  63.5,43.43 0 bottom
U$227  [HAPTIC6]  76.07,47.75 0 bottom
U$228  [MOTOR7]  78.87,46.1 0 bottom
U$229  [DRIVER8]  72.77,45.97 0 bottom
U$230  [DA72809]  76.07,44.32 0 bottom
U$231  [#IO#6]  65.23,46.53 0 bottom
U$232  [#QISO#0]  81.28,50.83 0 bottom
U$239  [#GPI0#PWM#2]  108.71,42.88 90 bottom
U$240  [#GPI1#2]  106.17,40.51 90 bottom
U$241  [#GPI2#2]  103.63,40.64 90 bottom
U$242  [#SDA#0]  96.01,40.51 90 bottom
U$243  [#GND#0]  90.93,40.51 90 bottom
U$246  [#SCL#1]  98.55,40.39 90 bottom
U$247  [#I2C#4]  106.07,53.37 0 bottom
U$248  [#LED#4]  86.83,53.51 0 bottom
U$250  [SFE_LOGO_FLAME_.1]  107.31,62.74 0 bottom
U$251  [##INT##3]  101.09,40.26 90 bottom
U$253  [#VDD#4]  93.47,40.64 90 bottom
U$255  [#VDDIO#5]  89.41,43.43 0 bottom
U$256  [HAPTIC6]  101.98,47.75 0 bottom
U$257  [MOTOR7]  104.78,46.1 0 bottom
U$258  [DRIVER8]  98.68,45.97 0 bottom
U$259  [DA72809]  101.98,44.32 0 bottom
U$260  [#IO#6]  91.14,46.53 0 bottom
U$261  [#QISO#0]  107.19,50.83 0 bottom
U$268  [#GPI0#PWM#2]  134.62,42.88 90 bottom
U$269  [#GPI1#2]  132.08,40.51 90 bottom
U$270  [#GPI2#2]  129.54,40.64 90 bottom
U$271  [#SDA#0]  121.92,40.51 90 bottom
U$272  [#GND#0]  116.84,40.51 90 bottom
U$275  [#SCL#1]  124.46,40.39 90 bottom
U$276  [#I2C#4]  131.98,53.37 0 bottom
U$277  [#LED#4]  112.73,53.51 0 bottom
U$279  [SFE_LOGO_FLAME_.1]  133.22,62.74 0 bottom
U$280  [##INT##3]  127,40.26 90 bottom
U$282  [#VDD#4]  119.38,40.64 90 bottom
U$284  [#VDDIO#5]  115.32,43.43 0 bottom
U$285  [HAPTIC6]  127.89,47.75 0 bottom
U$286  [MOTOR7]  130.68,46.1 0 bottom
U$287  [DRIVER8]  124.59,45.97 0 bottom
U$288  [DA72809]  127.89,44.32 0 bottom
U$289  [#IO#6]  117.04,46.53 0 bottom
U$290  [#QISO#0]  133.1,50.83 0 bottom
U$297  [#GPI0#PWM#2]  30.99,72.59 90 bottom
U$298  [#GPI1#2]  28.45,70.23 90 bottom
U$299  [#GPI2#2]  25.91,70.36 90 bottom
U$300  [#SDA#0]  18.29,70.23 90 bottom
U$301  [#GND#0]  13.21,70.23 90 bottom
U$304  [#SCL#1]  20.83,70.1 90 bottom
U$305  [#I2C#4]  28.34,83.09 0 bottom
U$306  [#LED#4]  9.1,83.23 0 bottom
U$308  [SFE_LOGO_FLAME_.1]  29.59,92.46 0 bottom
U$309  [##INT##3]  23.37,69.98 90 bottom
U$311  [#VDD#4]  15.75,70.36 90 bottom
U$313  [#VDDIO#5]  11.68,73.15 0 bottom
U$314  [HAPTIC6]  24.26,77.47 0 bottom
U$315  [MOTOR7]  27.05,75.82 0 bottom
U$316  [DRIVER8]  20.95,75.69 0 bottom
U$317  [DA72809]  24.26,74.04 0 bottom
U$318  [#IO#6]  13.41,76.25 0 bottom
U$319  [#QISO#0]  29.46,80.54 0 bottom
U$326  [#GPI0#PWM#2]  56.9,72.59 90 bottom
U$327  [#GPI1#2]  54.36,70.23 90 bottom
U$328  [#GPI2#2]  51.82,70.36 90 bottom
U$329  [#SDA#0]  44.2,70.23 90 bottom
U$330  [#GND#0]  39.12,70.23 90 bottom
U$333  [#SCL#1]  46.74,70.1 90 bottom
U$334  [#I2C#4]  54.25,83.09 0 bottom
U$335  [#LED#4]  35.01,83.23 0 bottom
U$337  [SFE_LOGO_FLAME_.1]  55.5,92.46 0 bottom
U$338  [##INT##3]  49.28,69.98 90 bottom
U$340  [#VDD#4]  41.66,70.36 90 bottom
U$342  [#VDDIO#5]  37.59,73.15 0 bottom
U$343  [HAPTIC6]  50.16,77.47 0 bottom
U$344  [MOTOR7]  52.96,75.82 0 bottom
U$345  [DRIVER8]  46.86,75.69 0 bottom
U$346  [DA72809]  50.16,74.04 0 bottom
U$347  [#IO#6]  39.32,76.25 0 bottom
U$348  [#QISO#0]  55.37,80.54 0 bottom
U$355  [#GPI0#PWM#2]  82.8,72.59 90 bottom
U$356  [#GPI1#2]  80.26,70.23 90 bottom
U$357  [#GPI2#2]  77.72,70.36 90 bottom
U$358  [#SDA#0]  70.1,70.23 90 bottom
U$359  [#GND#0]  65.02,70.23 90 bottom
U$362  [#SCL#1]  72.64,70.1 90 bottom
U$363  [#I2C#4]  80.16,83.09 0 bottom
U$364  [#LED#4]  60.92,83.23 0 bottom
U$366  [SFE_LOGO_FLAME_.1]  81.41,92.46 0 bottom
U$367  [##INT##3]  75.18,69.98 90 bottom
U$369  [#VDD#4]  67.56,70.36 90 bottom
U$371  [#VDDIO#5]  63.5,73.15 0 bottom
U$372  [HAPTIC6]  76.07,77.47 0 bottom
U$373  [MOTOR7]  78.87,75.82 0 bottom
U$374  [DRIVER8]  72.77,75.69 0 bottom
U$375  [DA72809]  76.07,74.04 0 bottom
U$376  [#IO#6]  65.23,76.25 0 bottom
U$377  [#QISO#0]  81.28,80.54 0 bottom
U$384  [#GPI0#PWM#2]  108.71,72.59 90 bottom
U$385  [#GPI1#2]  106.17,70.23 90 bottom
U$386  [#GPI2#2]  103.63,70.36 90 bottom
U$387  [#SDA#0]  96.01,70.23 90 bottom
U$388  [#GND#0]  90.93,70.23 90 bottom
U$391  [#SCL#1]  98.55,70.1 90 bottom
U$392  [#I2C#4]  106.07,83.09 0 bottom
U$393  [#LED#4]  86.83,83.23 0 bottom
U$395  [SFE_LOGO_FLAME_.1]  107.31,92.46 0 bottom
U$396  [##INT##3]  101.09,69.98 90 bottom
U$398  [#VDD#4]  93.47,70.36 90 bottom
U$400  [#VDDIO#5]  89.41,73.15 0 bottom
U$401  [HAPTIC6]  101.98,77.47 0 bottom
U$402  [MOTOR7]  104.78,75.82 0 bottom
U$403  [DRIVER8]  98.68,75.69 0 bottom
U$404  [DA72809]  101.98,74.04 0 bottom
U$405  [#IO#6]  91.14,76.25 0 bottom
U$406  [#QISO#0]  107.19,80.54 0 bottom
U$413  [#GPI0#PWM#2]  134.62,72.59 90 bottom
U$414  [#GPI1#2]  132.08,70.23 90 bottom
U$415  [#GPI2#2]  129.54,70.36 90 bottom
U$416  [#SDA#0]  121.92,70.23 90 bottom
U$417  [#GND#0]  116.84,70.23 90 bottom
U$420  [#SCL#1]  124.46,70.1 90 bottom
U$421  [#I2C#4]  131.98,83.09 0 bottom
U$422  [#LED#4]  112.73,83.23 0 bottom
U$424  [SFE_LOGO_FLAME_.1]  133.22,92.46 0 bottom
U$425  [##INT##3]  127,69.98 90 bottom
U$427  [#VDD#4]  119.38,70.36 90 bottom
U$429  [#VDDIO#5]  115.32,73.15 0 bottom
U$430  [HAPTIC6]  127.89,77.47 0 bottom
U$431  [MOTOR7]  130.68,75.82 0 bottom
U$432  [DRIVER8]  124.59,75.69 0 bottom
U$433  [DA72809]  127.89,74.04 0 bottom
U$434  [#IO#6]  117.04,76.25 0 bottom
U$435  [#QISO#0]  133.1,80.54 0 bottom
U$442  [#GPI0#PWM#2]  30.99,102.31 90 bottom
U$443  [#GPI1#2]  28.45,99.95 90 bottom
U$444  [#GPI2#2]  25.91,100.08 90 bottom
U$445  [#SDA#0]  18.29,99.95 90 bottom
U$446  [#GND#0]  13.21,99.95 90 bottom
U$449  [#SCL#1]  20.83,99.82 90 bottom
U$450  [#I2C#4]  28.34,112.81 0 bottom
U$451  [#LED#4]  9.1,112.94 0 bottom
U$453  [SFE_LOGO_FLAME_.1]  29.59,122.17 0 bottom
U$454  [##INT##3]  23.37,99.7 90 bottom
U$456  [#VDD#4]  15.75,100.08 90 bottom
U$458  [#VDDIO#5]  11.68,102.87 0 bottom
U$459  [HAPTIC6]  24.26,107.19 0 bottom
U$460  [MOTOR7]  27.05,105.54 0 bottom
U$461  [DRIVER8]  20.95,105.41 0 bottom
U$462  [DA72809]  24.26,103.76 0 bottom
U$463  [#IO#6]  13.41,105.97 0 bottom
U$464  [#QISO#0]  29.46,110.26 0 bottom
U$471  [#GPI0#PWM#2]  56.9,102.31 90 bottom
U$472  [#GPI1#2]  54.36,99.95 90 bottom
U$473  [#GPI2#2]  51.82,100.08 90 bottom
U$474  [#SDA#0]  44.2,99.95 90 bottom
U$475  [#GND#0]  39.12,99.95 90 bottom
U$478  [#SCL#1]  46.74,99.82 90 bottom
U$479  [#I2C#4]  54.25,112.81 0 bottom
U$480  [#LED#4]  35.01,112.94 0 bottom
U$482  [SFE_LOGO_FLAME_.1]  55.5,122.17 0 bottom
U$483  [##INT##3]  49.28,99.7 90 bottom
U$485  [#VDD#4]  41.66,100.08 90 bottom
U$487  [#VDDIO#5]  37.59,102.87 0 bottom
U$488  [HAPTIC6]  50.16,107.19 0 bottom
U$489  [MOTOR7]  52.96,105.54 0 bottom
U$490  [DRIVER8]  46.86,105.41 0 bottom
U$491  [DA72809]  50.16,103.76 0 bottom
U$492  [#IO#6]  39.32,105.97 0 bottom
U$493  [#QISO#0]  55.37,110.26 0 bottom
U$500  [#GPI0#PWM#2]  82.8,102.31 90 bottom
U$501  [#GPI1#2]  80.26,99.95 90 bottom
U$502  [#GPI2#2]  77.72,100.08 90 bottom
U$503  [#SDA#0]  70.1,99.95 90 bottom
U$504  [#GND#0]  65.02,99.95 90 bottom
U$507  [#SCL#1]  72.64,99.82 90 bottom
U$508  [#I2C#4]  80.16,112.81 0 bottom
U$509  [#LED#4]  60.92,112.94 0 bottom
U$511  [SFE_LOGO_FLAME_.1]  81.41,122.17 0 bottom
U$512  [##INT##3]  75.18,99.7 90 bottom
U$514  [#VDD#4]  67.56,100.08 90 bottom
U$516  [#VDDIO#5]  63.5,102.87 0 bottom
U$517  [HAPTIC6]  76.07,107.19 0 bottom
U$518  [MOTOR7]  78.87,105.54 0 bottom
U$519  [DRIVER8]  72.77,105.41 0 bottom
U$520  [DA72809]  76.07,103.76 0 bottom
U$521  [#IO#6]  65.23,105.97 0 bottom
U$522  [#QISO#0]  81.28,110.26 0 bottom
U$529  [#GPI0#PWM#2]  108.71,102.31 90 bottom
U$530  [#GPI1#2]  106.17,99.95 90 bottom
U$531  [#GPI2#2]  103.63,100.08 90 bottom
U$532  [#SDA#0]  96.01,99.95 90 bottom
U$533  [#GND#0]  90.93,99.95 90 bottom
U$536  [#SCL#1]  98.55,99.82 90 bottom
U$537  [#I2C#4]  106.07,112.81 0 bottom
U$538  [#LED#4]  86.83,112.94 0 bottom
U$540  [SFE_LOGO_FLAME_.1]  107.31,122.17 0 bottom
U$541  [##INT##3]  101.09,99.7 90 bottom
U$543  [#VDD#4]  93.47,100.08 90 bottom
U$545  [#VDDIO#5]  89.41,102.87 0 bottom
U$546  [HAPTIC6]  101.98,107.19 0 bottom
U$547  [MOTOR7]  104.78,105.54 0 bottom
U$548  [DRIVER8]  98.68,105.41 0 bottom
U$549  [DA72809]  101.98,103.76 0 bottom
U$550  [#IO#6]  91.14,105.97 0 bottom
U$551  [#QISO#0]  107.19,110.26 0 bottom
U$558  [#GPI0#PWM#2]  134.62,102.31 90 bottom
U$559  [#GPI1#2]  132.08,99.95 90 bottom
U$560  [#GPI2#2]  129.54,100.08 90 bottom
U$561  [#SDA#0]  121.92,99.95 90 bottom
U$562  [#GND#0]  116.84,99.95 90 bottom
U$565  [#SCL#1]  124.46,99.82 90 bottom
U$566  [#I2C#4]  131.98,112.81 0 bottom
U$567  [#LED#4]  112.73,112.94 0 bottom
U$569  [SFE_LOGO_FLAME_.1]  133.22,122.17 0 bottom
U$570  [##INT##3]  127,99.7 90 bottom
U$572  [#VDD#4]  119.38,100.08 90 bottom
U$574  [#VDDIO#5]  115.32,102.87 0 bottom
U$575  [HAPTIC6]  127.89,107.19 0 bottom
U$576  [MOTOR7]  130.68,105.54 0 bottom
U$577  [DRIVER8]  124.59,105.41 0 bottom
U$578  [DA72809]  127.89,103.76 0 bottom
U$579  [#IO#6]  117.04,105.97 0 bottom
U$580  [#QISO#0]  133.1,110.26 0 bottom
U$587  [#GPI0#PWM#2]  30.99,132.03 90 bottom
U$588  [#GPI1#2]  28.45,129.67 90 bottom
U$589  [#GPI2#2]  25.91,129.79 90 bottom
U$590  [#SDA#0]  18.29,129.67 90 bottom
U$591  [#GND#0]  13.21,129.67 90 bottom
U$594  [#SCL#1]  20.83,129.54 90 bottom
U$595  [#I2C#4]  28.34,142.53 0 bottom
U$596  [#LED#4]  9.1,142.66 0 bottom
U$598  [SFE_LOGO_FLAME_.1]  29.59,151.89 0 bottom
U$599  [##INT##3]  23.37,129.41 90 bottom
U$601  [#VDD#4]  15.75,129.79 90 bottom
U$603  [#VDDIO#5]  11.68,132.59 0 bottom
U$604  [HAPTIC6]  24.26,136.91 0 bottom
U$605  [MOTOR7]  27.05,135.25 0 bottom
U$606  [DRIVER8]  20.95,135.13 0 bottom
U$607  [DA72809]  24.26,133.48 0 bottom
U$608  [#IO#6]  13.41,135.69 0 bottom
U$609  [#QISO#0]  29.46,139.98 0 bottom
U$616  [#GPI0#PWM#2]  56.9,132.03 90 bottom
U$617  [#GPI1#2]  54.36,129.67 90 bottom
U$618  [#GPI2#2]  51.82,129.79 90 bottom
U$619  [#SDA#0]  44.2,129.67 90 bottom
U$620  [#GND#0]  39.12,129.67 90 bottom
U$623  [#SCL#1]  46.74,129.54 90 bottom
U$624  [#I2C#4]  54.25,142.53 0 bottom
U$625  [#LED#4]  35.01,142.66 0 bottom
U$627  [SFE_LOGO_FLAME_.1]  55.5,151.89 0 bottom
U$628  [##INT##3]  49.28,129.41 90 bottom
U$630  [#VDD#4]  41.66,129.79 90 bottom
U$632  [#VDDIO#5]  37.59,132.59 0 bottom
U$633  [HAPTIC6]  50.16,136.91 0 bottom
U$634  [MOTOR7]  52.96,135.25 0 bottom
U$635  [DRIVER8]  46.86,135.13 0 bottom
U$636  [DA72809]  50.16,133.48 0 bottom
U$637  [#IO#6]  39.32,135.69 0 bottom
U$638  [#QISO#0]  55.37,139.98 0 bottom
U$645  [#GPI0#PWM#2]  82.8,132.03 90 bottom
U$646  [#GPI1#2]  80.26,129.67 90 bottom
U$647  [#GPI2#2]  77.72,129.79 90 bottom
U$648  [#SDA#0]  70.1,129.67 90 bottom
U$649  [#GND#0]  65.02,129.67 90 bottom
U$652  [#SCL#1]  72.64,129.54 90 bottom
U$653  [#I2C#4]  80.16,142.53 0 bottom
U$654  [#LED#4]  60.92,142.66 0 bottom
U$656  [SFE_LOGO_FLAME_.1]  81.41,151.89 0 bottom
U$657  [##INT##3]  75.18,129.41 90 bottom
U$659  [#VDD#4]  67.56,129.79 90 bottom
U$661  [#VDDIO#5]  63.5,132.59 0 bottom
U$662  [HAPTIC6]  76.07,136.91 0 bottom
U$663  [MOTOR7]  78.87,135.25 0 bottom
U$664  [DRIVER8]  72.77,135.13 0 bottom
U$665  [DA72809]  76.07,133.48 0 bottom
U$666  [#IO#6]  65.23,135.69 0 bottom
U$667  [#QISO#0]  81.28,139.98 0 bottom
U$674  [#GPI0#PWM#2]  108.71,132.03 90 bottom
U$675  [#GPI1#2]  106.17,129.67 90 bottom
U$676  [#GPI2#2]  103.63,129.79 90 bottom
U$677  [#SDA#0]  96.01,129.67 90 bottom
U$678  [#GND#0]  90.93,129.67 90 bottom
U$681  [#SCL#1]  98.55,129.54 90 bottom
U$682  [#I2C#4]  106.07,142.53 0 bottom
U$683  [#LED#4]  86.83,142.66 0 bottom
U$685  [SFE_LOGO_FLAME_.1]  107.31,151.89 0 bottom
U$686  [##INT##3]  101.09,129.41 90 bottom
U$688  [#VDD#4]  93.47,129.79 90 bottom
U$690  [#VDDIO#5]  89.41,132.59 0 bottom
U$691  [HAPTIC6]  101.98,136.91 0 bottom
U$692  [MOTOR7]  104.78,135.25 0 bottom
U$693  [DRIVER8]  98.68,135.13 0 bottom
U$694  [DA72809]  101.98,133.48 0 bottom
U$695  [#IO#6]  91.14,135.69 0 bottom
U$696  [#QISO#0]  107.19,139.98 0 bottom
U$703  [#GPI0#PWM#2]  134.62,132.03 90 bottom
U$704  [#GPI1#2]  132.08,129.67 90 bottom
U$705  [#GPI2#2]  129.54,129.79 90 bottom
U$706  [#SDA#0]  121.92,129.67 90 bottom
U$707  [#GND#0]  116.84,129.67 90 bottom
U$710  [#SCL#1]  124.46,129.54 90 bottom
U$711  [#I2C#4]  131.98,142.53 0 bottom
U$712  [#LED#4]  112.73,142.66 0 bottom
U$714  [SFE_LOGO_FLAME_.1]  133.22,151.89 0 bottom
U$715  [##INT##3]  127,129.41 90 bottom
U$717  [#VDD#4]  119.38,129.79 90 bottom
U$719  [#VDDIO#5]  115.32,132.59 0 bottom
U$720  [HAPTIC6]  127.89,136.91 0 bottom
U$721  [MOTOR7]  130.68,135.25 0 bottom
U$722  [DRIVER8]  124.59,135.13 0 bottom
U$723  [DA72809]  127.89,133.48 0 bottom
U$724  [#IO#6]  117.04,135.69 0 bottom
U$725  [#QISO#0]  133.1,139.98 0 bottom
U$732  [#GPI0#PWM#2]  30.99,161.75 90 bottom
U$733  [#GPI1#2]  28.45,159.38 90 bottom
U$734  [#GPI2#2]  25.91,159.51 90 bottom
U$735  [#SDA#0]  18.29,159.38 90 bottom
U$736  [#GND#0]  13.21,159.38 90 bottom
U$739  [#SCL#1]  20.83,159.26 90 bottom
U$740  [#I2C#4]  28.34,172.25 0 bottom
U$741  [#LED#4]  9.1,172.38 0 bottom
U$743  [SFE_LOGO_FLAME_.1]  29.59,181.61 0 bottom
U$744  [##INT##3]  23.37,159.13 90 bottom
U$746  [#VDD#4]  15.75,159.51 90 bottom
U$748  [#VDDIO#5]  11.68,162.31 0 bottom
U$749  [HAPTIC6]  24.26,166.62 0 bottom
U$750  [MOTOR7]  27.05,164.97 0 bottom
U$751  [DRIVER8]  20.95,164.85 0 bottom
U$752  [DA72809]  24.26,163.19 0 bottom
U$753  [#IO#6]  13.41,165.4 0 bottom
U$754  [#QISO#0]  29.46,169.7 0 bottom
U$761  [#GPI0#PWM#2]  56.9,161.75 90 bottom
U$762  [#GPI1#2]  54.36,159.38 90 bottom
U$763  [#GPI2#2]  51.82,159.51 90 bottom
U$764  [#SDA#0]  44.2,159.38 90 bottom
U$765  [#GND#0]  39.12,159.38 90 bottom
U$768  [#SCL#1]  46.74,159.26 90 bottom
U$769  [#I2C#4]  54.25,172.25 0 bottom
U$770  [#LED#4]  35.01,172.38 0 bottom
U$772  [SFE_LOGO_FLAME_.1]  55.5,181.61 0 bottom
U$773  [##INT##3]  49.28,159.13 90 bottom
U$775  [#VDD#4]  41.66,159.51 90 bottom
U$777  [#VDDIO#5]  37.59,162.31 0 bottom
U$778  [HAPTIC6]  50.16,166.62 0 bottom
U$779  [MOTOR7]  52.96,164.97 0 bottom
U$780  [DRIVER8]  46.86,164.85 0 bottom
U$781  [DA72809]  50.16,163.19 0 bottom
U$782  [#IO#6]  39.32,165.4 0 bottom
U$783  [#QISO#0]  55.37,169.7 0 bottom
U$790  [#GPI0#PWM#2]  82.8,161.75 90 bottom
U$791  [#GPI1#2]  80.26,159.38 90 bottom
U$792  [#GPI2#2]  77.72,159.51 90 bottom
U$793  [#SDA#0]  70.1,159.38 90 bottom
U$794  [#GND#0]  65.02,159.38 90 bottom
U$797  [#SCL#1]  72.64,159.26 90 bottom
U$798  [#I2C#4]  80.16,172.25 0 bottom
U$799  [#LED#4]  60.92,172.38 0 bottom
U$801  [SFE_LOGO_FLAME_.1]  81.41,181.61 0 bottom
U$802  [##INT##3]  75.18,159.13 90 bottom
U$804  [#VDD#4]  67.56,159.51 90 bottom
U$806  [#VDDIO#5]  63.5,162.31 0 bottom
U$807  [HAPTIC6]  76.07,166.62 0 bottom
U$808  [MOTOR7]  78.87,164.97 0 bottom
U$809  [DRIVER8]  72.77,164.85 0 bottom
U$810  [DA72809]  76.07,163.19 0 bottom
U$811  [#IO#6]  65.23,165.4 0 bottom
U$812  [#QISO#0]  81.28,169.7 0 bottom
U$819  [#GPI0#PWM#2]  108.71,161.75 90 bottom
U$820  [#GPI1#2]  106.17,159.38 90 bottom
U$821  [#GPI2#2]  103.63,159.51 90 bottom
U$822  [#SDA#0]  96.01,159.38 90 bottom
U$823  [#GND#0]  90.93,159.38 90 bottom
U$826  [#SCL#1]  98.55,159.26 90 bottom
U$827  [#I2C#4]  106.07,172.25 0 bottom
U$828  [#LED#4]  86.83,172.38 0 bottom
U$830  [SFE_LOGO_FLAME_.1]  107.31,181.61 0 bottom
U$831  [##INT##3]  101.09,159.13 90 bottom
U$833  [#VDD#4]  93.47,159.51 90 bottom
U$835  [#VDDIO#5]  89.41,162.31 0 bottom
U$836  [HAPTIC6]  101.98,166.62 0 bottom
U$837  [MOTOR7]  104.78,164.97 0 bottom
U$838  [DRIVER8]  98.68,164.85 0 bottom
U$839  [DA72809]  101.98,163.19 0 bottom
U$840  [#IO#6]  91.14,165.4 0 bottom
U$841  [#QISO#0]  107.19,169.7 0 bottom
U$848  [#GPI0#PWM#2]  134.62,161.75 90 bottom
U$849  [#GPI1#2]  132.08,159.38 90 bottom
U$850  [#GPI2#2]  129.54,159.51 90 bottom
U$851  [#SDA#0]  121.92,159.38 90 bottom
U$852  [#GND#0]  116.84,159.38 90 bottom
U$855  [#SCL#1]  124.46,159.26 90 bottom
U$856  [#I2C#4]  131.98,172.25 0 bottom
U$857  [#LED#4]  112.73,172.38 0 bottom
U$859  [SFE_LOGO_FLAME_.1]  133.22,181.61 0 bottom
U$860  [##INT##3]  127,159.13 90 bottom
U$862  [#VDD#4]  119.38,159.51 90 bottom
U$864  [#VDDIO#5]  115.32,162.31 0 bottom
U$865  [HAPTIC6]  127.89,166.62 0 bottom
U$866  [MOTOR7]  130.68,164.97 0 bottom
U$867  [DRIVER8]  124.59,164.85 0 bottom
U$868  [DA72809]  127.89,163.19 0 bottom
U$869  [#IO#6]  117.04,165.4 0 bottom
U$870  [#QISO#0]  133.1,169.7 0 bottom

## Library data of the parts
E$2 E$4 FD2 FD4 FD6 FD8 FD10 FD12 FD14 FD16 FD18 FD20 FD22 FD24 FD26 FD28 FD30 FD32 FD34 FD36 FD38 FD40 FD42 FD44 FD46 FD48 FD50 FD52 FD54 FD56 FD58 FD60 FD62 FD64 FD66 FD68 FD70 FD72 FD74 FD76 FD78 FD80 FD82 FD84 FD86 FD88 FD90 FD92 FD94 FD96 FD98 FD100 FD102 FD104 FD106 FD108 FD110 FD112 FD114 FD116 FD118 FD120 LOGO1 LOGO2 LOGO5 LOGO7 LOGO9 LOGO11 LOGO13 LOGO15 LOGO17 LOGO19 LOGO21 LOGO23 LOGO25 LOGO27 LOGO29 LOGO31 LOGO33 LOGO35 LOGO37 LOGO39 LOGO41 LOGO43 LOGO45 LOGO47 LOGO49 LOGO51 LOGO53 LOGO55 LOGO57 LOGO59 U$26 U$47 U$76 U$105 U$134 U$163 U$192 U$221 U$250 U$279 U$308 U$337 U$366 U$395 U$424 U$453 U$482 U$511 U$540 U$569 U$598 U$627 U$656 U$685 U$714 U$743 U$772 U$801 U$830 U$859 = SparkFun-Aesthetics
E$6 = SparkFun-Retired
H13 H77 H91 H92 = SparkFun-Hardware
J123 = SparkFun-Connectors
JP1-JP120 = SparkFun-Jumpers
M1-M30 = TEMP; PROD_ID: COMP-15536
U$7 U$9-U$11 U$18 U$25 U$29 U$30 U$40 U$50 U$52-U$57 U$69 U$79 U$81-U$86 U$98 U$108 U$110-U$115 U$127 U$137 U$139-U$144 U$156 U$166 U$168-U$173 U$185 U$195 U$197-U$202 U$214 U$224 U$226-U$231 U$243 U$253 U$255-U$260 U$272 U$282 U$284-U$289 U$301 U$311 U$313-U$318 U$330 U$340 U$342-U$347 U$359 U$369 U$371-U$376 U$388 U$398 U$400-U$405 U$417 U$427 U$429-U$434 U$446 U$456 U$458-U$463 U$475 U$485 U$487-U$492 U$504 U$514 U$516-U$521 U$533 U$543 U$545-U$550 U$562 U$572 U$574-U$579 U$591 U$601 U$603-U$608 U$620 U$630 U$632-U$637 U$649 U$659 U$661-U$666 U$678 U$688 U$690-U$695 U$707 U$717 U$719-U$724 U$736 U$746 U$748-U$753 U$765 U$775 U$777-U$782 U$794 U$804 U$806-U$811 U$823 U$833 U$835-U$840 U$852 U$862 U$864-U$869 = top
U$12-U$14 U$16 U$21 U$23 U$24 U$27 U$31 U$36-U$39 U$43-U$45 U$48 U$58 U$65-U$68 U$72-U$74 U$77 U$87 U$94-U$97 U$101-U$103 U$106 U$116 U$123-U$126 U$130-U$132 U$135 U$145 U$152-U$155 U$159-U$161 U$164 U$174 U$181-U$184 U$188-U$190 U$193 U$203 U$210-U$213 U$217-U$219 U$222 U$232 U$239-U$242 U$246-U$248 U$251 U$261 U$268-U$271 U$275-U$277 U$280 U$290 U$297-U$300 U$304-U$306 U$309 U$319 U$326-U$329 U$333-U$335 U$338 U$348 U$355-U$358 U$362-U$364 U$367 U$377 U$384-U$387 U$391-U$393 U$396 U$406 U$413-U$416 U$420-U$422 U$425 U$435 U$442-U$445 U$449-U$451 U$454 U$464 U$471-U$474 U$478-U$480 U$483 U$493 U$500-U$503 U$507-U$509 U$512 U$522 U$529-U$532 U$536-U$538 U$541 U$551 U$558-U$561 U$565-U$567 U$570 U$580 U$587-U$590 U$594-U$596 U$599 U$609 U$616-U$619 U$623-U$625 U$628 U$638 U$645-U$648 U$652-U$654 U$657 U$667 U$674-U$677 U$681-U$683 U$686 U$696 U$703-U$706 U$710-U$712 U$715 U$725 U$732-U$735 U$739-U$741 U$744 U$754 U$761-U$764 U$768-U$770 U$773 U$783 U$790-U$793 U$797-U$799 U$802 U$812 U$819-U$822 U$826-U$828 U$831 U$841 U$848-U$851 U$855-U$857 U$860 U$870 = bot

## Nets
GND24: J123.1
N$2: JP1.1
N$3: JP3.3
N$4: JP3.1
N$5: M1.P$1
N$6: M1.P$2
N$8: JP5.1
N$9: JP6.3
N$10: JP6.1
N$11: M2.P$1
N$12: M2.P$2
N$14: JP9.1
N$15: JP10.3
N$16: JP10.1
N$17: M3.P$1
N$18: M3.P$2
N$20: JP13.1
N$21: JP14.3
N$22: JP14.1
N$23: M4.P$1
N$24: M4.P$2
N$26: JP17.1
N$27: JP18.3
N$28: JP18.1
N$29: M5.P$1
N$30: M5.P$2
N$32: JP21.1
N$33: JP22.3
N$34: JP22.1
N$35: M6.P$1
N$36: M6.P$2
N$38: JP25.1
N$39: JP26.3
N$40: JP26.1
N$41: M7.P$1
N$42: M7.P$2
N$44: JP29.1
N$45: JP30.3
N$46: JP30.1
N$47: M8.P$1
N$48: M8.P$2
N$50: JP33.1
N$51: JP34.3
N$52: JP34.1
N$53: M9.P$1
N$54: M9.P$2
N$56: JP37.1
N$57: JP38.3
N$58: JP38.1
N$59: M10.P$1
N$60: M10.P$2
N$62: JP41.1
N$63: JP42.3
N$64: JP42.1
N$65: M11.P$1
N$66: M11.P$2
N$68: JP45.1
N$69: JP46.3
N$70: JP46.1
N$71: M12.P$1
N$72: M12.P$2
N$74: JP49.1
N$75: JP50.3
N$76: JP50.1
N$77: M13.P$1
N$78: M13.P$2
N$80: JP53.1
N$81: JP54.3
N$82: JP54.1
N$83: M14.P$1
N$84: M14.P$2
N$86: JP57.1
N$87: JP58.3
N$88: JP58.1
N$89: M15.P$1
N$90: M15.P$2
N$92: JP61.1
N$93: JP62.3
N$94: JP62.1
N$95: M16.P$1
N$96: M16.P$2
N$98: JP65.1
N$99: JP66.3
N$100: JP66.1
N$101: M17.P$1
N$102: M17.P$2
N$104: JP69.1
N$105: JP70.3
N$106: JP70.1
N$107: M18.P$1
N$108: M18.P$2
N$110: JP73.1
N$111: JP74.3
N$112: JP74.1
N$113: M19.P$1
N$114: M19.P$2
N$116: JP77.1
N$117: JP78.3
N$118: JP78.1
N$119: M20.P$1
N$120: M20.P$2
N$122: JP81.1
N$123: JP82.3
N$124: JP82.1
N$125: M21.P$1
N$126: M21.P$2
N$128: JP85.1
N$129: JP86.3
N$130: JP86.1
N$131: M22.P$1
N$132: M22.P$2
N$134: JP89.1
N$135: JP90.3
N$136: JP90.1
N$137: M23.P$1
N$138: M23.P$2
N$140: JP93.1
N$141: JP94.3
N$142: JP94.1
N$143: M24.P$1
N$144: M24.P$2
N$146: JP97.1
N$147: JP98.3
N$148: JP98.1
N$149: M25.P$1
N$150: M25.P$2
N$152: JP101.1
N$153: JP102.3
N$154: JP102.1
N$155: M26.P$1
N$156: M26.P$2
N$158: JP105.1
N$159: JP106.3
N$160: JP106.1
N$161: M27.P$1
N$162: M27.P$2
N$164: JP109.1
N$165: JP110.3
N$166: JP110.1
N$167: M28.P$1
N$168: M28.P$2
N$170: JP113.1
N$171: JP114.3
N$172: JP114.1
N$173: M29.P$1
N$174: M29.P$2
N$176: JP117.1
N$177: JP118.3
N$178: JP118.1
N$179: M30.P$1
N$180: M30.P$2
QWIIC_BUS: JP3.2 JP4.1
QWIIC_BUS1: JP6.2 JP8.1
QWIIC_BUS2: JP10.2 JP12.1
QWIIC_BUS3: JP14.2 JP16.1
QWIIC_BUS4: JP18.2 JP20.1
QWIIC_BUS5: JP22.2 JP24.1
QWIIC_BUS6: JP26.2 JP28.1
QWIIC_BUS7: JP30.2 JP32.1
QWIIC_BUS8: JP34.2 JP36.1
QWIIC_BUS9: JP38.2 JP40.1
QWIIC_BUS10: JP42.2 JP44.1
QWIIC_BUS11: JP46.2 JP48.1
QWIIC_BUS12: JP50.2 JP52.1
QWIIC_BUS13: JP54.2 JP56.1
QWIIC_BUS14: JP58.2 JP60.1
QWIIC_BUS15: JP62.2 JP64.1
QWIIC_BUS16: JP66.2 JP68.1
QWIIC_BUS17: JP70.2 JP72.1
QWIIC_BUS18: JP74.2 JP76.1
QWIIC_BUS19: JP78.2 JP80.1
QWIIC_BUS20: JP82.2 JP84.1
QWIIC_BUS21: JP86.2 JP88.1
QWIIC_BUS22: JP90.2 JP92.1
QWIIC_BUS23: JP94.2 JP96.1
QWIIC_BUS24: JP98.2 JP100.1
QWIIC_BUS25: JP102.2 JP104.1
QWIIC_BUS26: JP106.2 JP108.1
QWIIC_BUS27: JP110.2 JP112.1
QWIIC_BUS28: JP114.2 JP116.1
QWIIC_BUS29: JP118.2 JP120.1
SCL24: J123.4
SDA24: J123.3
VDD: JP1.2 JP2.2 JP4.2
VDD1: JP5.2 JP7.2 JP8.2
VDD2: JP9.2 JP11.2 JP12.2
VDD3: JP13.2 JP15.2 JP16.2
VDD4: JP17.2 JP19.2 JP20.2
VDD5: JP21.2 JP23.2 JP24.2
VDD6: JP25.2 JP27.2 JP28.2
VDD7: JP29.2 JP31.2 JP32.2
VDD8: JP33.2 JP35.2 JP36.2
VDD9: JP37.2 JP39.2 JP40.2
VDD10: JP41.2 JP43.2 JP44.2
VDD11: JP45.2 JP47.2 JP48.2
VDD12: JP49.2 JP51.2 JP52.2
VDD13: JP53.2 JP55.2 JP56.2
VDD14: JP57.2 JP59.2 JP60.2
VDD15: JP61.2 JP63.2 JP64.2
VDD16: JP65.2 JP67.2 JP68.2
VDD17: JP69.2 JP71.2 JP72.2
VDD18: JP73.2 JP75.2 JP76.2
VDD19: JP77.2 JP79.2 JP80.2
VDD20: JP81.2 JP83.2 JP84.2
VDD21: JP85.2 JP87.2 JP88.2
VDD22: JP89.2 JP91.2 JP92.2
VDD23: JP93.2 JP95.2 JP96.2
VDD24: J123.2 JP97.2 JP99.2 JP100.2
VDD25: JP101.2 JP103.2 JP104.2
VDD26: JP105.2 JP107.2 JP108.2
VDD27: JP109.2 JP111.2 JP112.2
VDD28: JP113.2 JP115.2 JP116.2
VDD29: JP117.2 JP119.2 JP120.2
VDDIO: JP2.1
VDDIO1: JP7.1
VDDIO2: JP11.1
VDDIO3: JP15.1
VDDIO4: JP19.1
VDDIO5: JP23.1
VDDIO6: JP27.1
VDDIO7: JP31.1
VDDIO8: JP35.1
VDDIO9: JP39.1
VDDIO10: JP43.1
VDDIO11: JP47.1
VDDIO12: JP51.1
VDDIO13: JP55.1
VDDIO14: JP59.1
VDDIO15: JP63.1
VDDIO16: JP67.1
VDDIO17: JP71.1
VDDIO18: JP75.1
VDDIO19: JP79.1
VDDIO20: JP83.1
VDDIO21: JP87.1
VDDIO22: JP91.1
VDDIO23: JP95.1
VDDIO24: JP99.1
VDDIO25: JP103.1
VDDIO26: JP107.1
VDDIO27: JP111.1
VDDIO28: JP115.1
VDDIO29: JP119.1

## Tracks (layer width: path | path; a pad name or v marks a point on that pad's centre or on a via)
!INT!  (via drill 0.38)  (1 unrouted)
  Top 0.254: 30.72,14.99 30.99,14.72 30.99,12.95 30.38,12.35 v24.79,12.35 | 23.37,8.13 18.84,12.66 18.84,13.06 19.09,13.32
  Bottom 0.254: v24.79,12.35 23.37,10.93 23.37,8.13
!INT!1  (via drill 0.38)  (1 unrouted)
  Top 0.254: 56.63,14.99 56.9,14.72 56.9,12.95 56.29,12.35 v50.69,12.35 | 49.28,8.13 44.74,12.66 44.74,13.06 45,13.32
  Bottom 0.254: v50.69,12.35 49.28,10.93 49.28,8.13
!INT!2  (via drill 0.38)  (1 unrouted)
  Top 0.254: 82.54,14.99 82.8,14.72 82.8,12.95 82.2,12.35 v76.6,12.35 | 75.18,8.13 70.65,12.66 70.65,13.06 70.91,13.32
  Bottom 0.254: v76.6,12.35 75.18,10.93 75.18,8.13
!INT!3  (via drill 0.38)  (1 unrouted)
  Top 0.254: 108.44,14.99 108.71,14.72 108.71,12.95 108.11,12.35 v102.51,12.35 | 101.09,8.13 96.56,12.66 96.56,13.06 96.81,13.32
  Bottom 0.254: v102.51,12.35 101.09,10.93 101.09,8.13
!INT!4  (via drill 0.38)  (1 unrouted)
  Top 0.254: 134.35,14.99 134.62,14.72 134.62,12.95 134.02,12.35 v128.42,12.35 | 127,8.13 122.47,12.66 122.47,13.06 122.72,13.32
  Bottom 0.254: v128.42,12.35 127,10.93 127,8.13
!INT!5  (via drill 0.38)  (1 unrouted)
  Top 0.254: 30.72,44.7 30.99,44.44 30.99,42.67 30.38,42.07 v24.79,42.07 | 23.37,37.85 18.84,42.38 18.84,42.78 19.09,43.04
  Bottom 0.254: v24.79,42.07 23.37,40.65 23.37,37.85
!INT!6  (via drill 0.38)  (1 unrouted)
  Top 0.254: 56.63,44.7 56.9,44.44 56.9,42.67 56.29,42.07 v50.69,42.07 | 49.28,37.85 44.74,42.38 44.74,42.78 45,43.04
  Bottom 0.254: v50.69,42.07 49.28,40.65 49.28,37.85
!INT!7  (via drill 0.38)  (1 unrouted)
  Top 0.254: 82.54,44.7 82.8,44.44 82.8,42.67 82.2,42.07 v76.6,42.07 | 75.18,37.85 70.65,42.38 70.65,42.78 70.91,43.04
  Bottom 0.254: v76.6,42.07 75.18,40.65 75.18,37.85
!INT!8  (via drill 0.38)  (1 unrouted)
  Top 0.254: 108.44,44.7 108.71,44.44 108.71,42.67 108.11,42.07 v102.51,42.07 | 101.09,37.85 96.56,42.38 96.56,42.78 96.81,43.04
  Bottom 0.254: v102.51,42.07 101.09,40.65 101.09,37.85
!INT!9  (via drill 0.38)  (1 unrouted)
  Top 0.254: 134.35,44.7 134.62,44.44 134.62,42.67 134.02,42.07 v128.42,42.07 | 127,37.85 122.47,42.38 122.47,42.78 122.72,43.04
  Bottom 0.254: v128.42,42.07 127,40.65 127,37.85
!INT!10  (via drill 0.38)  (1 unrouted)
  Top 0.254: 30.72,74.42 30.99,74.15 30.99,72.39 30.38,71.79 v24.79,71.79 | 23.37,67.56 18.84,72.09 18.84,72.5 19.09,72.75
  Bottom 0.254: v24.79,71.79 23.37,70.37 23.37,67.56
!INT!11  (via drill 0.38)  (1 unrouted)
  Top 0.254: 56.63,74.42 56.9,74.15 56.9,72.39 56.29,71.79 v50.69,71.79 | 49.28,67.56 44.74,72.09 44.74,72.5 45,72.75
  Bottom 0.254: v50.69,71.79 49.28,70.37 49.28,67.56
!INT!12  (via drill 0.38)  (1 unrouted)
  Top 0.254: 82.54,74.42 82.8,74.15 82.8,72.39 82.2,71.79 v76.6,71.79 | 75.18,67.56 70.65,72.09 70.65,72.5 70.91,72.75
  Bottom 0.254: v76.6,71.79 75.18,70.37 75.18,67.56
!INT!13  (via drill 0.38)  (1 unrouted)